# Altium PCB PFCv04.03.PcbDoc
Units mm, origin at the board's own origin, x right, y up, seen from the top; angles counter-clockwise.
Board outline 76.71 x 30.99 mm, 4 copper layers (Top Layer, Internal Plane 1, Internal Plane 2, Bottom Layer); 94 components, 74 nets, 404 pads, 188 vias.
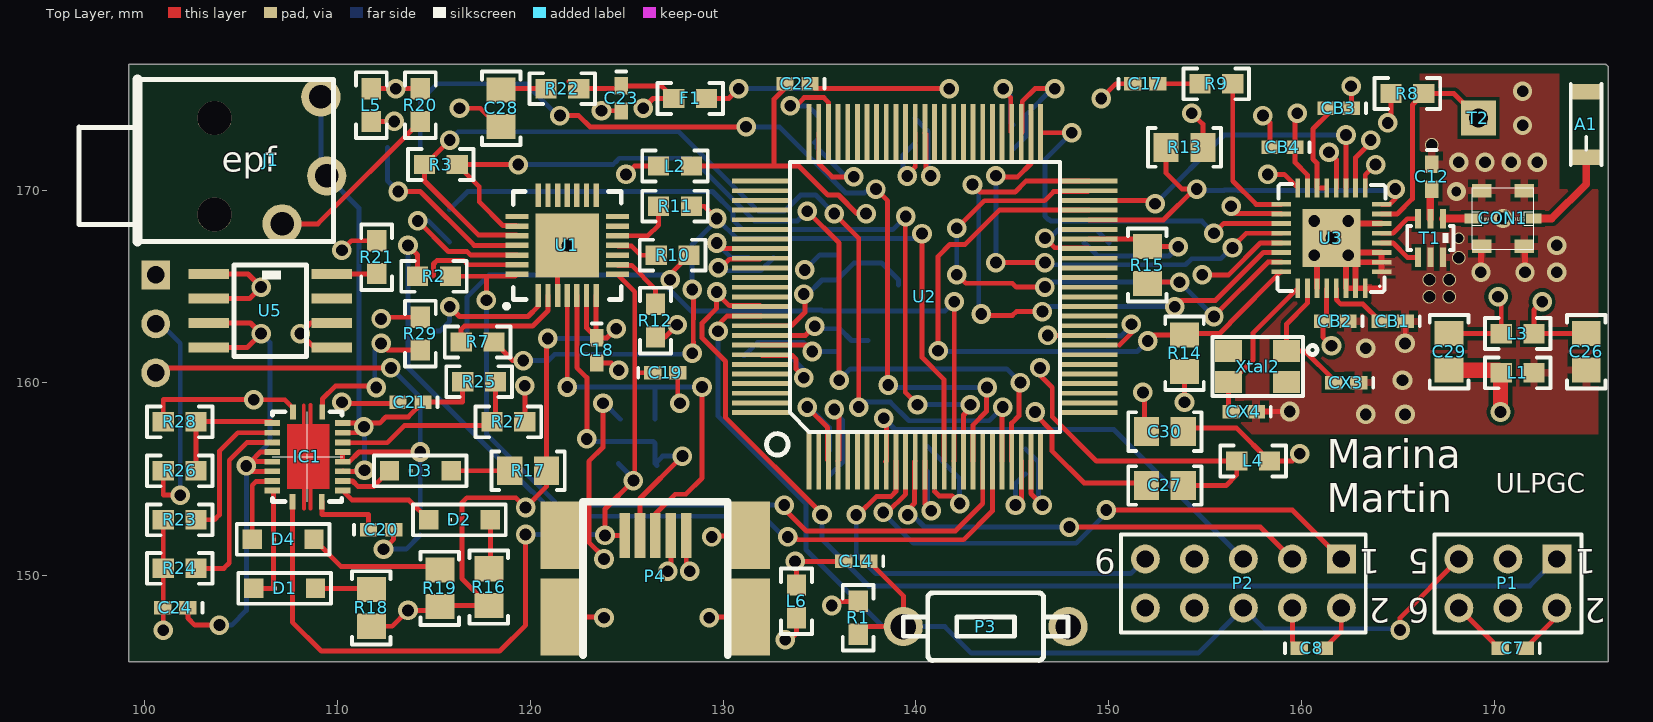
[diagram p0: Top Layer view]
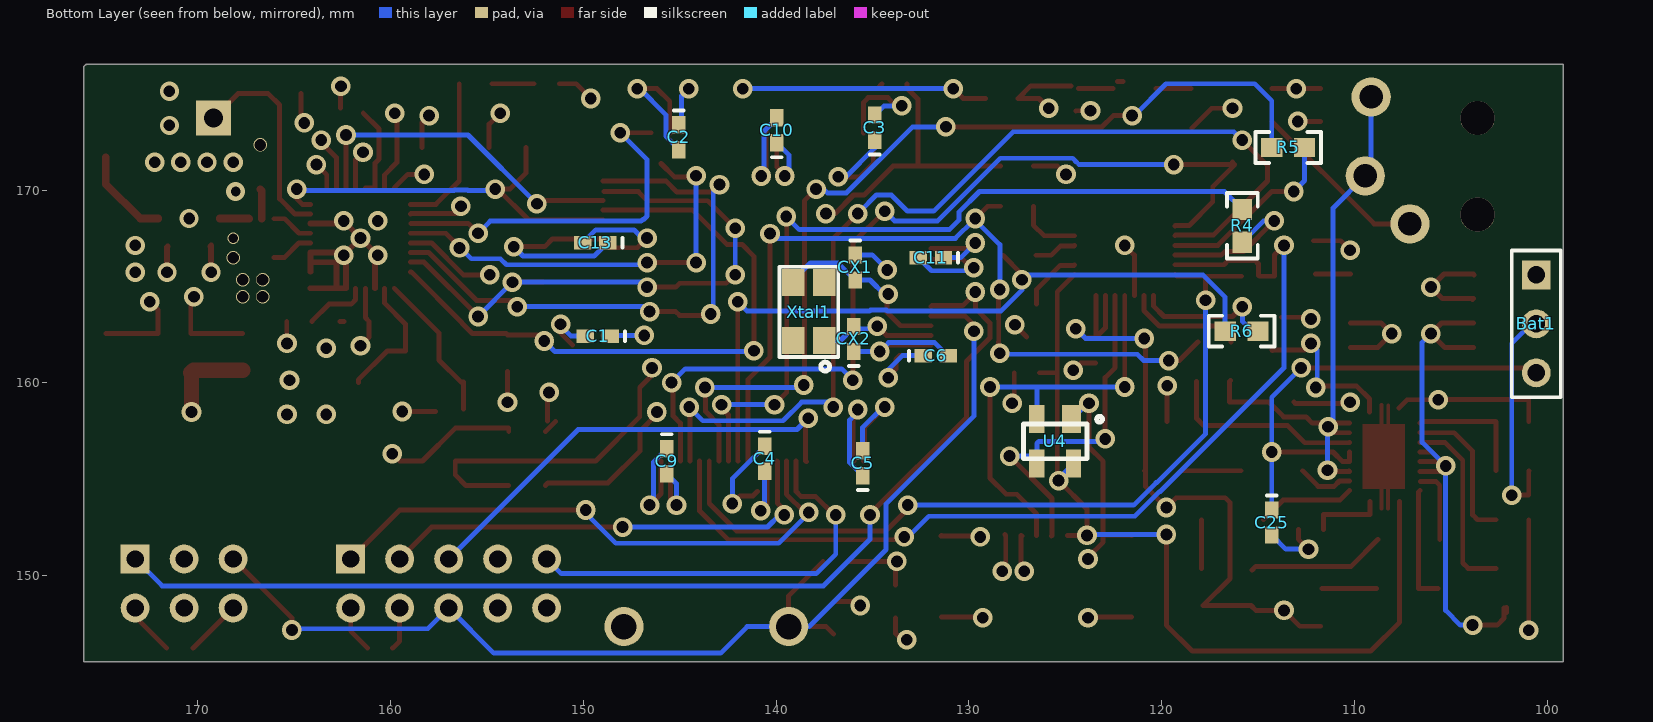
[diagram p1: Bottom Layer view, seen from below]
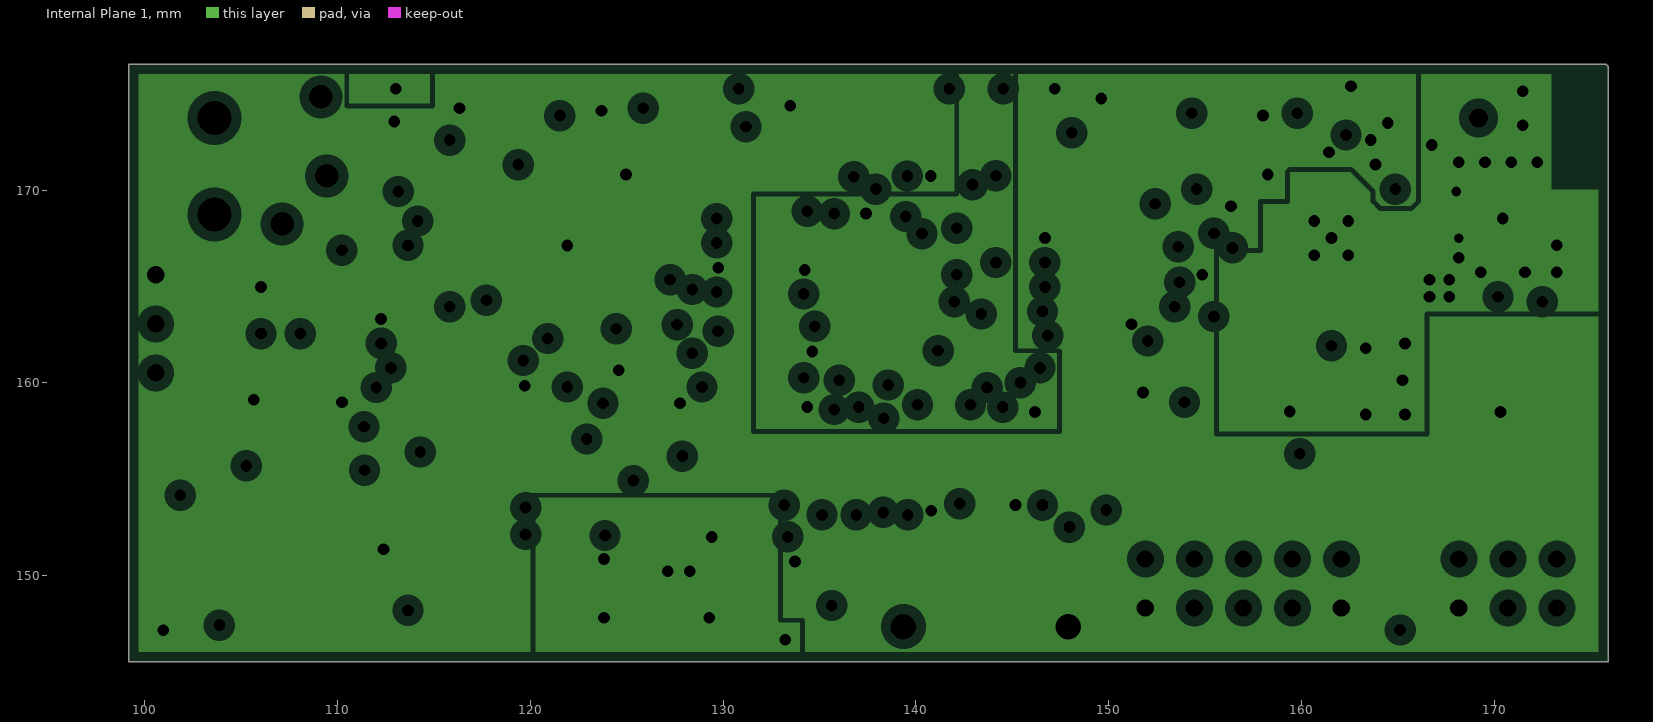
[diagram p2: Internal Plane 1, clearances drawn from the general rule]
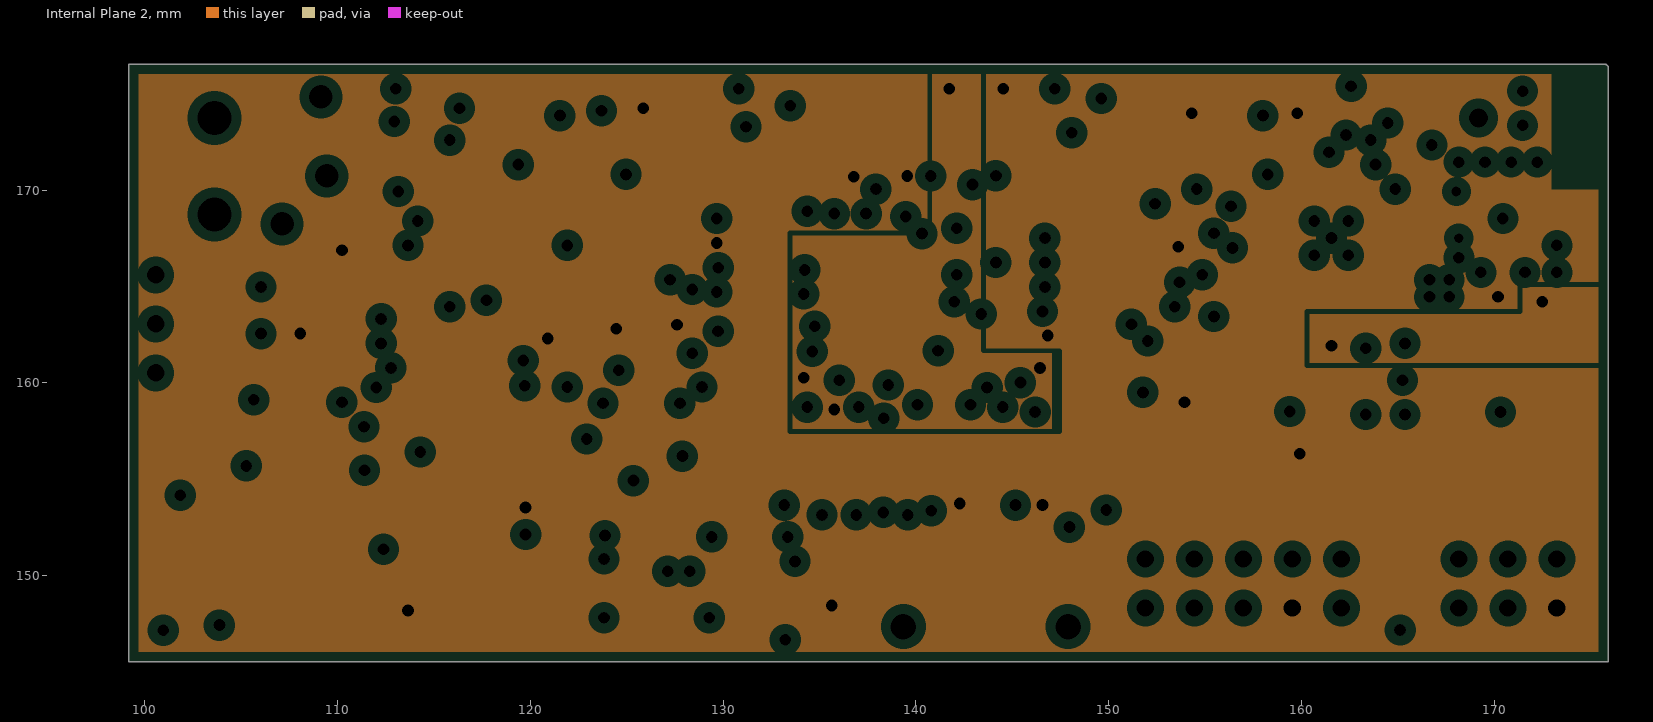
[diagram p3: Internal Plane 2, clearances drawn from the general rule]

## Layer stack, top to bottom
Top Layer: signal copper 0.0356
Dielectric: core 0.32, FR-4, Dk 4.8
Internal Plane 1: plane copper 0.0356, net (Multiple Nets)
Dielectric: prepreg 0.32, FR-4, Dk 4.8
Internal Plane 2: plane copper 0.0356, net (Multiple Nets)
Dielectric: core 0.32, FR-4, Dk 4.8
Bottom Layer: signal copper 0.0356

## Board outline
99.187,145.542 99.187,176.53 175.768,176.53 175.895,176.403 175.895,145.542 99.187,145.542

## Design rules (kind name [scope] priority, off if disabled: settings)
Clearance [All] p1: gap=0.2
ComponentClearance [All] p1: gap=0.15 collisioncheckmode=3 verticalgap=0.2 showdistances=TRUE
FabricationTestPointUsage TestPointUsage [All] p1: valid=0 allowmultiple=FALSE
FabricationTestpoint Testpoint [All] p1: side=3 testpointundercomponent=TRUE minsize=1.016 maxsize=2.54 preferedsize=1.524 minholesize=0 maxholesize=1.016 preferedholesize=0.813 testpointgrid=0.025 allowsidetop=TRUE allowsidebottom=TRUE usegrid=TRUE gridtolerance=0
MinimumSolderMaskSliver [All] p1 off: minsoldermaskwidth=0.1
PlaneClearance [All] p1: clearance=0.508
PlaneConnect [All] p1: planeconnectstyle=Direct reliefexpansion=0.508 reliefentries=4 reliefconductorwidth=0.254 reliefairgap=0.254
PolygonConnect PolygonConnect_2 [(IsVia AND InNet('RF-GND'))] p1: connectstyle=Direct reliefconductorwidth=0.254 reliefentries=4 polygonreliefangle="90 Angle"
PolygonConnect PolygonConnect_1 [All vs IsNamedPolygon('RFGND')] p2: connectstyle=Relief reliefconductorwidth=0.4 reliefentries=4 polygonreliefangle="90 Angle"
PolygonConnect [All] p3: connectstyle=Relief reliefconductorwidth=0.3 reliefentries=4 polygonreliefangle="90 Angle"
RoutingVias [All] p1: holewidth=0.4 width=0.9 viastyle="Through Hole" minholewidth=0.3 minwidth=0.3 maxholewidth=10 maxwidth=10
SilkToSilkClearance [All] p1 off: silktosilkclearance=0.2
SilkscreenOverComponentPads [All] p1 off: minsilkscreentomaskgap=0
SolderMaskExpansion [All] p1: expansion=0.102
Width [All] p1: maxlimit=10 minlimit=0.2 preferedwidth=0.2
20 further rules are at their usual default settings.

## Components (designator, comment, footprint, x,y, rotation, side; value= is the part's Value field where it differs from the comment)
A1 "Ant. 2.45G" "ANTENNA CHIP" 174.752,171.704 r90 top
Bat1 "Batttery" HDR1X3 100.584,165.608 r270 bottom
C1 "C" 0402 149.24,162.433 r0 bottom
C2 "C" 0402 145.034,172.735 r270 bottom
C3 "C" 0402 134.874,173.243 r90 bottom
C4 "C" 0402 140.589,156.068 r270 bottom
C5 "C" 0402 135.509,155.844 r90 bottom
C6 "C" 0402 131.714,161.417 r180 bottom
C7 "C" 0402 170.942,146.253 r180 top
C8 "C" 0402 160.528,146.253 r0 top
C9 "C" 0402 145.669,155.941 r270 bottom
C10 "C" 0402 139.954,173.101 r90 bottom
C11 "C" 0402 131.968,166.497 r0 bottom
C12 "22pF_0402" 0402 166.751,170.688 r270 top
C13 "C" 0402 149.367,167.259 r0 bottom
C14 "C" 0402 136.906,150.749 r180 top
C17 "C" 0402 151.892,175.514 r0 top
C18 "C" 0402 123.444,161.686 r270 top
C19 "C" 0402 127,160.528 r0 top
C20 "C" 0402 112.268,152.4 r0 top
C21 "C" 0402 113.792,159.004 r180 top
C22 "C" 0402 133.858,175.514 r180 top
C23 "C" 0402 124.714,174.752 r270 top
C24 "C" 0402 101.6,148.336 r180 top
C25 "C" 0402 114.3,152.766 r270 bottom
C26 "100nF_0805" 0805 174.752,161.62 r90 top
C27 "100nF_0805" 0805 152.908,154.686 r0 top
C28 "10uF" 0805 118.491,174.244 r90 top
C29 "100nF_0805" 0805 167.64,161.62 r90 top
C30 "100nF_0805" 0805 152.908,157.48 r0 top
CB1 "C" 0402 164.719,163.195 r180 top
CB2 "C" 0402 161.747,163.195 r180 top
CB3 "C" 0402 161.925,174.244 r180 top
CB4 "C" 0402 159.004,172.212 r180 top
CON1 "Conector Antena" "MM8430-2600_COAXIAL CONNECTORS" 170.434,168.529 r0 top
CX1 "C" 0402 135.89,165.989 r270 bottom
CX2 "C" 0402 135.966,162.281 r90 bottom
CX3 "C" 0402 162.306,160.02 r180 top
CX4 "C" 0402 156.997,158.521 r180 top
D1 "Diodo Led" "DIODE LED" 107.264,149.352 r180 top
D2 "Diodo Led" "DIODE LED" 116.332,152.908 r180 top
D3 "Diodo Led" "DIODE LED" 114.3,155.448 r180 top
D4 "Diodo Led" "DIODE LED" 107.188,151.892 r180 top
F1 "Ferrita" 0603 128.295,174.752 r0 top
IC1 "BQ24031" BQ24031 108.266,153.476 r90 top
J1 "CAMSHOT" MJ-2509N 99.644,170.739 r270 top
L1 "22nH_0603" 0603 171.196,160.528 r180 top
L2 "22nH_0603" 0603 127.508,171.247 r180 top
L3 "22nH_0603" 0603 171.196,162.56 r0 top
L4 "22nH_0603" 0603 157.48,155.956 r180 top
L5 "22nH_0603" 0603 111.76,174.41 r270 top
L6 "22nH_0603" 0603 133.807,148.678 r90 top
P1 "Programador" HDR2X3 173.228,150.876 r180 top
P2 "Programador" HDR2X5 162.052,150.876 r180 top
P3 "Pulsador" PUSH-BUTTON-W 139.344,147.371 r0 top
P4 "USB-AB" USB-MINI-AB-SMT 126.492,152.095 r90 top
R1 "R 0402" 0603 137.008,147.828 r90 top
R2 "R 0402" 0603 115.011,165.532 r180 top
R3 "R 0402" 0603 115.367,171.323 r180 top
R4 "R 0402" 0603 115.824,168.148 r90 bottom
R5 "R 0402" 0603 113.45,172.212 r0 bottom
R6 "R 0402" 0603 115.863,162.687 r0 bottom
R7 "R 0402" 0603 117.272,162.128 r0 top
R8 "R 0402" 0603 165.481,175.006 r180 top
R9 "R 0402" 0603 155.575,175.514 r180 top
R10 "R 0402" 0603 127.381,166.624 r180 top
R11 "R 0402" 0603 127.508,169.164 r180 top
R12 "R 0402" 0603 126.492,163.234 r90 top
R13 "16.9kohm-0805" 0805 153.924,172.212 r0 top
R14 "16.9kohm-0805" 0805 153.924,161.544 r270 top
R15 "16.9kohm-0805" 0805 151.994,166.116 r90 top
R16 "16.9kohm-0805" 0805 117.856,149.418 r270 top
R17 "16.9kohm-0805" 0805 119.888,155.448 r0 top
R18 "16.9kohm-0805" 0805 111.76,148.336 r270 top
R19 "16.9kohm-0805" 0805 115.316,149.352 r270 top
R20 "R 0402" 0603 114.3,174.41 r90 top
R21 "R 0402" 0603 112.039,166.522 r90 top
R22 "R 0402" 0603 121.666,175.26 r0 top
R23 "R 0402" 0603 101.823,152.908 r180 top
R24 "R 0402" 0603 101.823,150.391 r180 top
R25 "R 0402" 0603 117.348,160.071 r180 top
R26 "R 0402" 0603 101.823,155.448 r0 top
R27 "R 0402" 0603 118.872,157.988 r180 top
R28 "R 0402" 0603 101.823,157.988 r0 top
R29 "R 0402" 0603 114.3,162.56 r270 top
T1 "BALUN" BALUN 166.675,167.513 r270 top
T2 "TESTPOINT" TESTPOINT 169.164,173.736 r0 top
U1 "USB" QFN28_5X5 121.92,167.132 r90 top
U2 "XMEGA" QUAD100 140.462,164.465 r90 top
U3 "RF TRAN" QFN32_50 161.544,167.513 r90 top
U4 "TVS" SOT-143 125.527,156.972 r0 bottom
U5 "TPS77633D" TPS77633D 104.648,166.116 r270 top
Xtal1 "Xtal TSX-4025" TSX-4025 138.303,163.703 r90 bottom
Xtal2 "Xtal TSX-4025" TSX-4025 157.709,160.858 r180 top

## Footprints (in the part's own frame and the unit in brackets; to place one, negate y for a bottom-side part, rotate by r counter-clockwise, add the part's x,y. Pads: shape width x height; smd on the part's side, far side on the other; paste and mask are expansions set on the pad)
0402 [mm] "Chip Capacitor; Body 1.0 x 0.5 mm (LxW typ)"
  rect 0.9x0.7 smd: 1(-0.65,0) 2(0.65,0)
  silkscreen extent -1.4,-0.25 -1.4,0.25
0603 [mm]
  rect 1.1x1 smd: 1(-0.85,0) 2(0.85,0)
  silkscreen extent -1.7,-0.8 1.7,0.8
0805 [mm] "Chip Resistor; Body 2.0 x 1.3 mm (LxW typ)"
  rect 1.3x1.5 smd: 1(-0.95,0) 2(0.95,0)
  silkscreen extent -1.9,-1 1.9,1
"ANTENNA CHIP" [mm] "ANTENNA CHIP 2.4GHZ"
  rect 0.8x1.6 smd: 1(0,0) 2(3.4,0)
  silkscreen extent -0.4,-0.8 3.8,0.8
BALUN [mm] "FILTER BALUN CER CHIP 2.4GHZ"
  rect 1x0.3 smd: 1(-1,0.65) 2(-1,0) 3(-1,-0.65) 4(1,-0.65) 5(1,0) 6(1,0.65)
  silkscreen extent -0.62,-1.2 0.62,1.2
BQ24031 [mm]
  rect 0.8x0.3 smd: 1(0.37,-0.93) 10(5.02,-0.955) 11(5.02,0.57) 20(0.37,0.595)
  rect 0.3x0.8 smd: 2(0.945,-2.005) 3(1.445,-2.005) 4(1.945,-2.005) 5(2.445,-2.005) 6(2.945,-2.005) 7(3.445,-2.005) 8(3.945,-2.005) 9(4.445,-2.005) 12(4.445,1.645) 13(3.945,1.645) 14(3.445,1.645) 15(2.945,1.645) 16(2.445,1.645) 17(1.945,1.645) 18(1.445,1.645) 19(0.945,1.645)
  Top Layer region: 1.015,-1.315 4.39,-1.315 4.39,0.865 1.015,0.865
  Top Layer lines w0.2: 5.355,0.005 0,0 ; 0,-0.35 5.375,-0.35
  silkscreen extent 0.37,-2 5.03,1.65
"DIODE LED" [mm]
  rect 1x1 smd: 1(-1.6,0) 2(1.6,0)
  silkscreen extent -2.4,-0.8 2.4,0.8
HDR1X3 [mm] "Connector; Header; 3 Position"
  rect 1.5x1.5 hole 0.9: 1(0,0)
  round 1.5 hole 0.9: 2(2.54,0) 3(5.08,0)
  silkscreen extent -1.27,-1.27 6.35,1.27
HDR2X3 [mm] "Connector; Header; 3x2 Position"
  rect 1.5x1.5 hole 0.9: 1(0,0)
  round 1.5 hole 0.9: 2(0,2.54) 3(2.54,0) 4(2.54,2.54) 5(5.08,0) 6(5.08,2.54)
  silkscreen extent -1.27,-1.27 6.35,3.81
HDR2X5 [mm] "Connector; Header; 5x2 Position"
  rect 1.5x1.5 hole 0.9: 1(0,0)
  round 1.5 hole 0.9: 2(0,2.54) 3(2.54,0) 4(2.54,2.54) 5(5.08,0) 6(5.08,2.54) 7(7.62,0) 8(7.62,2.54) 9(10.16,0) 10(10.16,2.54)
  silkscreen extent -1.27,-1.27 11.43,3.81
MJ-2509N [mil] "CONN MONO JACK 2.5MM PCB MNT"
  round 80 hole 48: 1(98,295) 2(0,386) 3(-161,374)
  round 70 hole 70: NC(-118,157) NC(79,157)
  silkscreen extent -197,-120 134,400
"MM8430-2600_COAXIAL CONNECTORS" [mm]
  rect 0.8x0.5 smd: 1(-1.6,0) 2(1.6,0)
  rect 1x0.7 smd: 3(-1.1,1.45) 4(1.1,1.45) 5(-1.102,-1.45) 6(1.1,-1.45)
  silkscreen extent -1.6,-1.6 1.6,1.6
PUSH-BUTTON-W [mil] "SWITCH TACT 6X3.5MM H=4.3MM"
  round 80 hole 52: 1(0,0) 2(336.22,0)
  silkscreen extent 0,-69 336,69
QFN28_5X5 [mm] "QFN para SiLab CP2102"
  rect 3.3x3.3 smd: 0(0,0)
  rect 1.2x0.28 smd: 1(-2.6,1.5) 2(-2.6,1) 3(-2.6,0.5) 4(-2.6,0) 5(-2.6,-0.5) 6(-2.6,-1) 7(-2.6,-1.5) 15(2.6,-1.5) 16(2.6,-1) 17(2.6,-0.5) 18(2.6,0) 19(2.6,0.5) 20(2.6,1) 21(2.6,1.5)
  rect 0.28x1.2 smd: 8(-1.5,-2.6) 9(-1,-2.6) 10(-0.5,-2.6) 11(0,-2.6) 12(0.5,-2.6) 13(1,-2.6) 14(1.5,-2.6) 22(1.5,2.6) 23(1,2.6) 24(0.5,2.6) 25(0,2.6) 26(-0.5,2.6) 27(-1,2.6) 28(-1.5,2.6)
  silkscreen extent -3.25,-2.8 2.8,3.25
QFN32_50 [mm] "QFN32"
  rect 0.25x1 smd: 1(-1.75,-2.6) 2(-1.25,-2.6) 3(-0.75,-2.6) 4(-0.25,-2.6) 5(0.25,-2.6) 6(0.75,-2.6) 7(1.25,-2.6) 8(1.75,-2.6) 17(1.75,2.6) 18(1.25,2.6) 19(0.75,2.6) 20(0.25,2.6) 21(-0.25,2.6) 22(-0.75,2.6) 23(-1.25,2.6) 24(-1.75,2.6)
  rect 1x0.25 smd: 9(2.6,-1.75) 10(2.6,-1.25) 11(2.6,-0.75) 12(2.6,-0.25) 13(2.6,0.25) 14(2.6,0.75) 15(2.6,1.25) 16(2.6,1.75) 25(-2.6,1.75) 26(-2.6,1.25) 27(-2.6,0.75) 28(-2.6,0.25) 29(-2.6,-0.25) 30(-2.6,-0.75) 31(-2.6,-1.25) 32(-2.6,-1.75)
  rect 3x3 smd: 33(0,0)
  silkscreen extent -2.8,-2.8 2.8,2.8
QUAD100 [mm]
  rect 3x0.25 smd: 1(-8.5,6) 2(-8.5,5.5) 3(-8.5,5) 4(-8.5,4.5) 5(-8.5,4) 6(-8.5,3.5) 7(-8.5,3) 8(-8.5,2.5) 9(-8.5,2) 10(-8.5,1.5) 11(-8.5,1) 12(-8.5,0.5) 13(-8.5,0) 14(-8.5,-0.5) 15(-8.5,-1) 16(-8.5,-1.5) 17(-8.5,-2) 18(-8.5,-2.5) 19(-8.5,-3) 20(-8.5,-3.5) 21(-8.5,-4) 22(-8.5,-4.5) 23(-8.5,-5) 24(-8.5,-5.5) 25(-8.5,-6) 51(8.5,-6) 52(8.5,-5.5) 53(8.5,-5) 54(8.5,-4.5) 55(8.5,-4) 56(8.5,-3.5) 57(8.5,-3) 58(8.5,-2.5) 59(8.5,-2) 60(8.5,-1.5) 61(8.5,-1) 62(8.5,-0.5) 63(8.5,0) 64(8.5,0.5) 65(8.5,1) 66(8.5,1.5) 67(8.5,2) 68(8.5,2.5) 69(8.5,3) 70(8.5,3.5) 71(8.5,4) 72(8.5,4.5) 73(8.5,5) 74(8.5,5.5) 75(8.5,6)
  rect 0.25x3 smd: 26(-6,-8.5) 27(-5.5,-8.5) 28(-5,-8.5) 29(-4.5,-8.5) 30(-4,-8.5) 31(-3.5,-8.5) 32(-3,-8.5) 33(-2.5,-8.5) 34(-2,-8.5) 35(-1.5,-8.5) 36(-1,-8.5) 37(-0.5,-8.5) 38(0,-8.5) 39(0.5,-8.5) 40(1,-8.5) 41(1.5,-8.5) 42(2,-8.5) 43(2.5,-8.5) 44(3,-8.5) 45(3.5,-8.5) 46(4,-8.5) 47(4.5,-8.5) 48(5,-8.5) 49(5.5,-8.5) 50(6,-8.5) 76(6,8.5) 77(5.5,8.5) 78(5,8.5) 79(4.5,8.5) 80(4,8.5) 81(3.5,8.5) 82(3,8.5) 83(2.5,8.5) 84(2,8.5) 85(1.5,8.5) 86(1,8.5) 87(0.5,8.5) 88(0,8.5) 89(-0.5,8.5) 90(-1,8.5) 91(-1.5,8.5) 92(-2,8.5) 93(-2.5,8.5) 94(-3,8.5) 95(-3.5,8.5) 96(-4,8.5) 97(-4.5,8.5) 98(-5,8.5) 99(-5.5,8.5) 100(-6,8.5)
  silkscreen extent -8.21,-7 7,8.21
SOT-143 [mm] "SOT143"
  rect 1x1.45 smd: 1(-0.85,-1.15)
  rect 0.8x1.45 smd: 2(0.95,-1.15) 3(0.95,1.15) 4(-0.95,1.15)
  silkscreen extent -2.45,-1.3 1.65,0.9
TESTPOINT [mm] "Punto de test"
  rect 1.8x1.8 hole 1: 1(0,0)
TPS77633D [mm]
  rect 0.51x2.116 smd: 1(0.467,-1.312) 2(1.737,-1.312) 3(3.007,-1.312) 4(4.277,-1.312) 5(4.277,5.058) 6(3.007,5.058) 7(1.737,5.058) 8(0.467,5.058)
  silkscreen extent 0,0 4.75,3.75
TSX-4025 [mm] "Xtal 16Mhz"
  rect 1.4x1.15 smd: 1(-1.5,-0.8) 2(1.5,-0.8) 3(1.5,0.8) 4(-1.5,0.8)
  silkscreen extent -3.09,-1.52 2.33,1.53
USB-MINI-AB-SMT [mm] "Conector MINI-USB-AB-SMT"
  rect 2.35x0.55 smd: D+(0,0) D-(0,0.8) ID(0,-0.8) UGND(0,-1.6) VBUS(0,1.6)
  rect 4x2.05 smd: shield(-4.225,-4.925) shield(-4.225,4.925)
  rect 3.5x2.05 smd: shield(0,4.925) shield(0,-4.925)
  silkscreen extent -6.2,-3.75 1.75,3.75

## Part data
A1: library part 2450AT18A100, "ANTENNA CHIP 2.4GHZ"
Bat1: library part "Header 3", "Header, 3-Pin"
C1 C2 C3 C4 C5 C6 C7 C8 C9 C10 C11 C13 C14 C17 C18 C19 C20 C21 C22 C23 C24 C25 CB1 CB2 CB3 CB4 CX1 CX2 CX3 CX4: "CONDENSADOR"
C12: library part 56pF_0402, "CAP CER 56PF 50V 5% C0G 0402"
C26 C27 C29 C30: "CAP CER 100PF 630V X7R 0805"
C28: library part 10uF_0805, "CAP CER 10UF 10V Y5V 0805"
CON1: library part "CON ANT-MM8430-2600RA1", "CONN MW COAXIAL WITH SWITCH"
D1 D2 D3 D4: library part LTST-C230CKT, "Typical INFRARED GaAs LED"
F1: library part BLM21AH102SN1, "Chip Ferrite Beads"
IC1: "IC PWR MANAGEMENT SYSTEM 20-QFN"
J1: library part MJ-2509N_1, "CONN MONO JACK 2.5MM PCB MNT"
L1 L2 L3 L4 L5 L6: "CER INDUCTOR 22NH 0603"
P1: library part "Header 3X2", "Header, 3-Pin, Dual row"
P2: library part "Header 5X2", "Header, 5-Pin, Dual row"
P3: library part PUSHBUTTON, "SWITCH TACT 6X3.5MM H=4.3MM 180G"
P4: library part WM1722, "CONN RECEPT USB 5POS RT ANG SMD"
R1 R2 R3 R4 R5 R6 R7 R8 R9 R10 R11 R12 R20 R21 R22 R23 R24 R25 R26 R27 R28 R29: "RESISTENCIA 0402 SMD"
R13 R14 R15 R16 R17 R18 R19: "RES 16.9K OHM 1/8W 1% 0805 SMD"
T1: library part 2450FB39B100E, "FILTER BALUN CER CHIP 2.4GHZ"
T2: "Punto de Test"
U1: library part CP2102, "IC USB-TO-UART BRIDGE 28MLP"
U2: library part ATXMEGA64A1, "MCU AVR 64K FLASH 1.6V 100-TQFP"
U3: library part AT86RF231, "IC TXRX ZIGBEE/802.15.4 32QFN"
U4: library part SP0503BAHTG, "TVS AVAL DIODE ARRAY 3 CH SOT143"
U5: "IC 3.3V 500MA LDO REG 8-SOIC"
Xtal1 Xtal2: "Cristal 16Mhz"

## Via types
v1: diameter 1.016, hole 0.61, Top Layer to Bottom Layer, 168 vias
v2: diameter 1, hole 0.6, Top Layer to Bottom Layer, 11 vias
v3: diameter 0.7, hole 0.6, Top Layer to Bottom Layer, 6 vias
v4: diameter 1, hole 0.5, Top Layer to Bottom Layer, 1 vias
v5: diameter 1.016, hole 0.61, Top Layer to Bottom Layer, tented bottom, 1 vias
v6: diameter 0.6, hole 0.5, Top Layer to Bottom Layer, 1 vias

## Nets (pads, with @x,y where several pads share a name; then routed paths per layer and width w, separated by ;. In a path a pad name is that pad's centre, name@x,y a point inside that pad or via, vN(x,y) a via of type N, cw(c..) or ccw(c..) an arc to the next point about the centre after c; other vN are vias at no path point)
A-GND: C5.2 C6.2 C22.2 C27.1 CX1.1 CX2.1 L2.1 U2.3 U2.93 | length 39.1
  Top Layer w0.254: L2.1 133.934,171.247 135.436,169.745 135.982,169.745 136.944,168.783 v1(137.414,168.783) ; U2.93 134.326,161.965 v1@134.641,161.65 ; 132.642,171.301 132.642,174.717 133.208,175.283 C22.2 ; v1(134.366,158.75) 135.414,157.702 135.414,156.013 U2.3 ; v1(146.177,158.496) 146.177,158.369 147.062,157.484 147.062,156.468 148.717,154.813 151.831,154.813 C27.1
  Bottom Layer w0.254: C6.2 C6.2@131.191,161.544 ; C6.2@131.102,161.417 131.779,162.094 134.159,162.094 v1(134.623,161.631) CX2.1 ; v1(134.239,165.862) 135.016,166.639 CX1.1 ; v1(134.366,158.75) 134.455,158.75 135.509,157.696 C5.2 C5.2@135.509,156.718
A-VCC: C5.1 C6.1 C22.1 C27.2 F1.2 L4.2 U2.4 U2.94 | length 48.4
  Top Layer w0.254: F1.2 130.302,174.752 v1(130.81,175.26) ; U2.94@132.01,161.417 133.597,161.417 133.789,161.226 133.789,160.724 v1@134.239,160.274 ; C22.1 134.762,175.26 v1(141.732,175.26) ; U2.4 136.01,156.013 v1@136.01,158.242 ; v1(146.431,160.782) 146.431,160.401 147.066,159.766 147.066,158.242 149.352,155.956 L4.2 156.63,155.233 156.083,154.686 C27.2
  Bottom Layer w0.254: v1(130.81,175.26) v1(141.732,175.26) ; C6.1 133.456,161.417 134.239,160.634 v1@134.239,160.274 ; C5.1 136.186,155.871 136.186,158.073 v1@136.017,158.242
  other v1: 135.763,158.623 134.188,160.274
D+: P4.D+ U1.4 U4.2 | length 22
  Top Layer w0.254: v1(121.92,159.791) U1.4 ; P4.D+ 126.492,153.208 127.516,154.232 128.07,154.232 128.905,155.067 v1@128.905,159.385
  Bottom Layer w0.254: v1(121.92,159.791) 126.477,159.791 ; U4.2 126.477,159.791 ; v1(128.905,159.791) 126.477,159.791
D-: P4.D- U1.5 U4.3 | length 18.9
  Top Layer w0.254: U1.5 122.42,160.79 122.936,160.274 v1(122.936,157.099) ; P4.D-@125.73,152.057 P4.D- 125.692,154.013 v1(127.889,156.21)
  Bottom Layer w0.254: v1@123.063,156.972 126.365,156.972 126.477,156.86 U4.3 ; U4.3@126.576,155.723 U4.3 ; v1(127.889,156.21) 126.865,156.21 U4.3
DC-GND: L5.1 R20.2 | length 2.5
  Top Layer w0.254: L5.1 R20.2
  other v1: 113.03,175.26
GND: Bat1.1 C1.2 C2.2 C3.2 C4.2 C7.2 C8.2 C9.2 C10.2 C11.2 C13.2 C14.2 C17.1 C18.2 C19.2 C20.2 C21.2 C23.2 C24.2 C25.2 C28.1 C29.1 C30.1 CB3.1 CB4.2 IC1.11 L1.2 L2.2 L5.2 L6.2 P1.6 P2.2 P2.10 P3.2 R8.2 R23.2 R24.2 R27.1 R28.1 R29.1 U1.0 U1.3 U2.13 U2.23 U2.33 U2.43 U2.53 U2.63 U2.73 U2.84 U3.9 U3.10 U3.12 U3.16 U3.18 U3.21 U5.1 U5.2 | length 121.6
  Top Layer w0.254: v1(100.973,147.185) R24.2 R23.2 ; R28.1 100.973,159.139 v1@105.656,159.139 ; U5.1@103.803,165.608 103.844,165.649 105.369,165.649 v1(106.045,164.973) 105.451,164.379 103.844,164.379 U5.2@103.884,164.338 ; v1(105.664,159.131) 107.277,159.131 IC1.11@107.696,158.712 ; v1(110.236,159.004) 110.309,158.931 113.069,158.931 C21.2 ; L5.2 v1(112.952,173.56) ; v1(112.268,163.322) 112.356,163.41 113.792,163.41 ; v1(112.395,151.384) 112.918,151.907 C20.2 ; v1(116.332,174.244) 117.414,174.244 C28.1@118.427,173.231 ; R27.1 v1(119.722,159.854) ; U1.3 121.42,166.632 v1(121.92,167.132) ; C18.2 124.206,161.036 v1(124.587,160.655) ; v1(123.698,174.117) 124.445,174.117 C23.2@124.46,174.102 ; v1(124.968,170.815) 125.4,171.247 L2.2 ; C19.2 127.65,159.116 v1@127.762,159.004 ; v1(129.754,165.971) 129.811,165.914 129.823,165.914 130.327,166.417 131.914,166.417 U2.84 ; v1(133.477,174.371) 133.781,174.371 134.202,174.792 135.223,174.792 135.462,174.552 U2.73 ; v1(133.731,150.749) C14.2 ; L6.2 v1@133.807,150.673 ; U2.13 140.462,153.721 140.789,153.394 v1(140.789,153.37) ; U2.63 140.51,172.917 140.51,170.987 v1(140.767,170.73) ; v1(145.161,153.67) 145.462,153.971 U2.23 ; U2.53 145.51,173.013 145.51,174.6 146.17,175.26 v1(147.193,175.26) ; v1(146.685,167.513) 147.187,167.011 U2.43@148.916,167.011 ; v1(149.606,174.752) 150.368,175.514 C17.1 ; 150.549,161.965 151.17,162.586 v1(151.17,163.05) ; C30.1@151.425,158.013 C30.1 ; v1(151.765,159.512) v1@151.958,159.319 ; C30.1@151.848,158.032 v1@151.848,159.429 ; v1@154.94,165.608 156.21,165.608 157.865,167.263 U3.21 ; v1(156.337,169.164) 156.337,169.037 156.591,168.783 158.924,168.783 U3.18 ; v1(157.988,173.863) 158.354,173.497 CB4.2 ; v1(158.242,170.815) 159.092,170.815 U3.16 ; C8.2 162.052,147.127 P2.2 ; v1(161.417,171.958) 161.794,171.581 U3.12 ; v1(162.56,175.387) 162.575,175.372 CB3.1 ; U3.10 162.794,171.684 ; 162.829,171.719 v1@163.703,172.593 ; U3.9 163.294,170.787 v1(163.83,171.323) ; v1@164.631,173.482 R8.2 ; P1.6 C7.2@170.231,146.253
  Top Layer w0.8: C29.1 170.204,160.67 L1.2 170.307,160.489 v1(170.307,158.496)
  Bottom Layer w0.254: v1(112.395,151.384) 113.568,151.384 C25.2 ; v1(129.754,165.971) 129.754,165.881 129.815,165.82 131.941,165.82 C11.2 ; v1(133.477,174.371) 134.396,174.371 C3.2 C3.2@134.874,173.855 ; C10.2 139.954,173.713 140.631,173.036 v1@140.631,170.866 ; C4.2 140.589,153.594 140.789,153.394 v1(140.789,153.37) ; C2.2@145.034,172.123 145.711,172.8 145.711,173.905 v1@147.13,175.323 ; v1(145.161,153.67) 145.161,154.783 C9.2 ; v1(146.685,167.513) 146.939,167.513 147.362,167.936 149.34,167.936 C13.2 ; C1.2 150.622,162.433 v1@151.17,162.981
  other v1: 127.762,158.953 154.838,165.608 163.576,172.593 164.465,173.482
IRQ: R14.1 U2.47 U3.24 | length 32.9
  Top Layer w0.254: v1@141.151,161.671 141.151,166.57 141.767,167.186 142.548,167.186 144.327,168.965 U2.47 ; v1(152.019,162.179) 152.334,162.494 R14.1 153.995,162.565 155.744,162.565 156.283,163.103 156.283,163.123 158.923,165.763 U3.24
  Bottom Layer w0.254: v1@141.519,161.63 151.47,161.63 v1(152.019,162.179)
  other v1: 141.148,161.671
ISET2: IC1.7 R25.1 R27.2 | length 10.4
  Top Layer w0.254: IC1.7 110.293,156.899 112.583,156.899 113.472,157.788 117.822,157.788 118.198,158.164 R25.1
NetA1_1: A1.1 CON1.2 | length 4.9
  Top Layer w0.394: CON1.2 172.974,168.529 174.752,170.307 A1.1
NetBat1_2: Bat1.2 R26.1 | length 11.6
  Top Layer w0.254: R26.1@100.965,155.448 R26.1 100.973,154.186 v1@101.846,154.186
  Bottom Layer w0.254: Bat1.2 100.838,163.068 101.854,162.052 v1@101.854,154.305
  other v1: 101.854,154.178
NetBat1_3: Bat1.3 C25.1 IC1.5 IC1.6 | length 25.2
  Top Layer w0.254: Bat1.3 100.838,160.782 v1(112.776,160.782) ; IC1.6 IC1.5 110.625,155.921 111.125,156.421 v1(114.3,156.421)
  Bottom Layer w0.254: Bat1.3@100.457,160.528 Bat1.3 ; v1(112.776,160.782) 114.3,159.258 v1(114.3,156.421) C25.1
NetC12_2: C12.2 T1.2 | length 1.6
  Top Layer w0.39: T1.2 166.675,169.962 C12.2
NetC17_2: C17.2 R9.2 | length 2.2
  Top Layer w0.254: C17.2 R9.2
NetC20_1: C20.1 IC1.1 | length 3.9
  Top Layer w0.254: IC1.1 109.196,153.186 111.609,153.186 111.618,153.177 C20.1
NetC24_1: C24.1 IC1.15 IC1.16 IC1.17 U5.3 U5.4 | length 28.7
  Top Layer w0.254: C24.1@102.119,148.085 102.13,148.341 C24.1@102.131,148.359 ; C24.1 102.25,147.813 102.616,147.447 v1(103.886,147.447) ; U5.4@103.844,161.839 105.324,161.839 v1(106.045,162.56) 105.496,163.109 U5.3@103.844,163.109 ; IC1.17 105.564,155.421 v1(105.283,155.702) v1@105.502,155.921 ; IC1.16 v1@105.502,155.921 ; IC1.15 106.002,156.421 v1@105.502,155.921
  Bottom Layer w0.254: v1(103.886,147.447) 104.521,147.447 105.283,148.209 v1(105.283,155.702) 106.499,156.918 106.499,162.106 v1(106.045,162.56) v1@106.045,162.306
NetC28_2: C28.2 R22.1 | length 1.8
  Top Layer w0.254: C28.2@118.491,175.26 R22.1@120.308,175.26
NetCB1_2: CB1.2 U3.29 | length 3.3
  Top Layer w0.254: U3.29 161.794,164.326 162.034,164.086 163.178,164.086 CB1.2
NetCB3_2: CB3.2 U3.13 U3.14 | length 4.8
  Top Layer w0.254: U3.13 U3.14 160.794,171.4 160.582,171.612 160.582,173.17 CB3.2@161.402,173.99
NetCON1_1: CON1.1 T1.1 | length 1.5
  Top Layer w0.394: T1.1 167.341,168.529 CON1.1
NetCX1_2: CX1.2 U2.91 Xtal1.3 | length 9.6
  Top Layer w0.254: U2.91 133.549,162.965 134.239,163.655 v1@134.239,164.592
  Bottom Layer w0.254: v1@134.356,164.567 135.128,165.339 135.902,165.339 136.793,166.23 138.213,166.23 139.103,165.34 Xtal1.3 Xtal1.3@139.103,165.066
  other v1: 134.188,164.611
NetCX2_2: CX2.2 U2.92 Xtal1.1 | length 6.4
  Top Layer w0.254: U2.92 134.271,162.465 v1(134.747,162.941)
  Bottom Layer w0.254: v1@134.747,162.814 v1@134.62,162.814 ; v1(134.747,162.941) v1@134.62,162.814 ; Xtal1.1 136.656,162.203 136.045,162.814 v1@134.62,162.814
NetCX3_2: CX3.2 U3.26 Xtal2.1 | length 6.9
  Top Layer w0.254: U3.26 160.294,164.134 159.209,163.049 Xtal2.1 160.16,161.658 161.656,160.162 CX3.2
NetCX4_2: CX4.2 U3.25 Xtal2.3 | length 7.8
  Top Layer w0.254: CX4.2@156.209,158.66 Xtal2.3 156.346,160.058 157.48,161.192 157.48,162.599 U3.25
NetD1_1: D1.1 R18.1 | length 2.8
  Top Layer w0.254: D1.1 R18.1@111.694,149.352
NetD1_2: D1.2 IC1.19 | length 6.1
  Top Layer w0.254: D1.2 106.68,149.352 106.68,154.362 IC1.19
NetD2_1: D2.1 R16.1 | length 2.5
  Top Layer w0.254: R16.1@117.932,150.368 D2.1
NetD2_2: D2.2 IC1.2 | length 5.1
  Top Layer w0.254: IC1.2 110.768,153.924 113.716,153.924 D2.2
NetD3_1: D3.1 R17.1 | length 3
  Top Layer w0.254: D3.1 R17.1
NetD3_2: D3.2 IC1.3 | length 2.9
  Top Layer w0.254: IC1.3 110.783,154.921 111.062,154.642 111.894,154.642 D3.2
NetD4_1: D4.1 R19.1 | length 7.2
  Top Layer w0.254: D4.1 110.185,150.495 115.123,150.495 R19.1
NetD4_2: D4.2 IC1.18 | length 3.9
  Top Layer w0.254: D4.2 105.588,154.699 105.787,154.898 IC1.18@106.598,154.898
NetIC1_10: IC1.10 R29.2 | length 8.5
  Top Layer w0.254: IC1.10 109.221,159.17 109.89,159.839 111.941,159.839 v1(112.014,159.766) ; v1(112.268,162.052) 112.61,161.71 R29.2 R29.2@114.261,161.671
  Bottom Layer w0.254: v1(112.014,159.766) 111.941,159.839 111.941,161.725 v1(112.268,162.052)
NetIC1_13: IC1.13 R23.1 | length 7.8
  Top Layer w0.254: R23.1 103.632,152.908 103.886,153.162 103.886,156.464 104.843,157.421 IC1.13 IC1.13@106.616,157.426
NetIC1_14: IC1.14 R24.1 | length 9.8
  Top Layer w0.254: R24.1@102.718,150.391 R24.1 104.117,150.391 104.394,150.667 104.394,155.994 105.321,156.921 IC1.14
NetJ1_1: J1.1 R20.1 | length 9.4
  Top Layer w0.254: J1.1 108.99,168.25 R20.1
NetR4_1: R4.1 U1.26 | length 8
  Top Layer w0.254: v1(114.173,168.402) 115.762,166.813 116.735,166.813 116.915,166.632 U1.26
  Bottom Layer w0.254: v1(114.173,168.402) 114.72,168.402 R4.1
NetR5_1: R5.1 U1.25 | length 9.8
  Top Layer w0.254: v1(113.157,169.926) 114.3,169.926 117.094,167.132 U1.25
  Bottom Layer w0.254: R5.1 112.6,170.483 v1(113.157,169.926)
NetR6_1: R6.1 U1.1 | length 7.4
  Top Layer w0.254: v1(115.824,163.957) 116.332,163.449 119.888,163.449 120.42,163.981 U1.1
  Bottom Layer w0.254: R6.1 115.316,162.687 115.824,163.195 v1(115.824,163.957)
NetR7_1: R7.1 U1.2 | length 6.3
  Top Layer w0.254: R7.1 116.422,162.777 116.6,162.955 120.128,162.955 120.92,163.747 U1.2
NetR8_1: R8.1 T2.1 U3.7 | length 11
  Top Layer w0.254: U3.7 164.953,168.763 165.735,169.545 165.735,174.41 R8.1 167.894,175.006 T2.1
NetR9_1: R9.1 U3.17 | length 8.1
  Top Layer w0.254: R9.1 156.425,170.473 157.635,169.263 U3.17
NetR10_2: R10.2 U1.11 | length 2.2
  Top Layer w0.254: U1.11 124.553,167.099 125.255,167.099 125.73,166.624 R10.2
NetR11_2: R11.2 U1.12 | length 3.3
  Top Layer w0.254: U1.12 126.103,167.632 126.658,168.187 R11.2
NetR12_2: R12.2 U1.9 | length 3.3
  Top Layer w0.254: U1.9 124.553,166.099 125.255,166.099 126.492,164.862 R12.2
NetR21_1: R21.1 U5.8 | length 1.8
  Top Layer w0.254: U5.8@110.214,165.649 R21.1@112.039,165.649
NetT1_3: T1.3 U3.5 | length 2.2
  Top Layer w0.254: U3.5 164.731,167.763 165.481,168.513 T1.3
NetT1_4: T1.4 U3.4 | length 2.2
  Top Layer w0.254: U3.4 164.731,167.263 165.481,166.513 T1.4
NRST: R13.1 U2.46 U3.8 | length 20.8
  Top Layer w0.254: U2.46@148.964,168.463 U2.46 148.971,168.456 152.835,168.456 154.432,170.053 153.797,170.053 152.974,170.876 R13.1 ; U3.8 164.564,169.263 164.846,169.545 v1(164.846,170.053)
  Bottom Layer w0.254: v1@154.632,169.98 155.972,169.98 155.991,169.999 156.683,169.999 156.702,169.98 v1@164.773,169.98
  other v1: 154.559,170.053
NSEL: R15.1 U2.49 U3.23 | length 30.7
  Top Layer w0.254: v1(142.113,165.608) 142.154,165.608 142.589,165.173 144.999,165.173 145.199,164.973 v1(146.685,164.973) ; v1(142.113,168.021) 143.542,169.45 146.667,169.45 147.137,169.919 U2.49@148.916,169.919 ; R15.1@152.055,165.227 v1(153.67,165.227) ; v1@155.448,163.456 158.255,166.263 U3.23
  Bottom Layer w0.254: v1(142.113,165.608) v1(142.113,168.021) ; v1(146.685,164.973) 146.939,165.227 v1(153.67,165.227) v1(155.448,163.449)
PIN9: P2.5 U2.9 | length 24.3
  Top Layer w0.254: v1(138.327,158.173) 138.381,158.173 138.462,158.091 U2.9 U2.9@138.414,155.917
  Bottom Layer w0.254: v1@138.406,158.091 v1@138.409,158.091 ; P2.5 150.26,157.588 138.912,157.588 v1@138.409,158.091 ; v1@138.409,158.091 138.462,158.091 138.381,158.173 v1(138.327,158.173) v1@138.409,158.091
PIN10: P2.9 U2.10 | length 21.9
  Top Layer w0.254: v1(136.906,153.162) 136.995,153.162 137.957,154.124 138.709,154.124 138.962,154.378 U2.10
  Bottom Layer w0.254: v1(136.906,153.162) 136.906,151.13 137.922,150.114 151.13,150.114 P2.9
PIN11: P2.1 U2.11 | length 29.6
  Top Layer w0.254: v1(138.303,153.289) 138.516,153.289 139.462,154.236 U2.11 ; v1(149.86,153.416) 159.512,153.416 P2.1
  Bottom Layer w0.254: v1(138.303,153.289) 138.303,153.251 139.862,151.692 148.301,151.692 149.86,153.251 v1(149.86,153.416)
PIN12: P2.3 U2.12 | length 23.9
  Top Layer w0.254: v1(139.573,153.162) 139.573,153.416 139.932,153.775 139.932,155.935 U2.12 ; v1(147.955,152.527) 157.861,152.527 P2.3
  Bottom Layer w0.254: v1(139.573,153.162) 139.816,153.162 140.443,152.535 147.947,152.535 v1(147.955,152.527)
PIN15: R7.2 R11.1 U2.15 | length 43.6
  Top Layer w0.254: R7.2 119.087,161.163 v1(119.634,161.163) ; R11.1 129.032,169.164 v1(129.667,168.529) ; v1(128.397,161.544) 128.47,161.617 128.47,162.134 128.451,162.153 128.451,163.294 128.47,163.313 128.47,164.773 v1(128.397,164.846) ; v1(140.313,167.745) 140.313,161.325 141.462,160.176 U2.15
  Bottom Layer w0.254: v1(119.634,161.163) 120.942,161.163 121.269,161.49 128.343,161.49 v1(128.397,161.544) ; v1(128.397,164.846) 128.397,167.17 v1@129.667,168.44 ; v1(129.667,168.529) v1@129.667,168.44 ; v1@140.189,167.621 v1(140.313,167.745) 140.062,167.494 130.702,167.494 129.756,168.44 v1@129.667,168.44
PIN16: R6.2 R10.1 U2.16 | length 38.8
  Top Layer w0.254: v1(127.254,165.354) 127.254,165.647 R10.1 ; U2.16 141.986,155.989 v1(141.986,164.211)
  Bottom Layer w0.254: R6.2 116.713,164.452 117.856,165.595 127.013,165.595 v1(127.254,165.354) 127.254,164.808 128.34,163.722 134.22,163.722 134.274,163.776 135.093,163.776 135.147,163.722 141.497,163.722 v1(141.986,164.211)
PIN17: R4.2 U2.17 | length 42
  Top Layer w0.254: v1@139.471,168.724 139.471,168.91 v1(139.471,168.631) 139.446,168.641 139.446,159.512 v1(140.081,158.877) ; U2.17 142.462,158.337 v1@143.002,158.877
  Bottom Layer w0.254: R4.2 116.752,169.926 129.451,169.926 130.518,168.859 130.518,168.44 131.01,167.948 138.789,167.948 v1(139.471,168.631) ; v1(140.081,158.877) v1@143.002,158.877
  other v1: 142.824,158.877
PIN18: R5.2 U2.18 | length 49.2
  Top Layer w0.254: v1(121.539,173.863) 122.517,173.863 123.098,173.282 v1(131.191,173.282) ; v1(137.922,170.053) 138.532,169.443 138.532,159.741 138.557,159.766 v1(138.557,159.893) ; U2.18 142.962,157.834 143.659,158.531 v1@143.659,159.737
  Bottom Layer w0.254: R5.2 114.3,174.625 115.189,175.514 119.78,175.514 121.431,173.863 v1(121.539,173.863) ; v1(131.191,173.282) 132.915,173.282 136.344,169.853 137.341,169.853 137.541,170.053 v1(137.922,170.053) ; v1@138.303,159.766 v1(143.688,159.766) 143.71,159.766 v1@143.837,159.893
PIN19: R2.1 U1.28 U2.19 | length 42.4
  Top Layer w0.254: R2.1 117.729,165.532 ; v1(117.729,164.287) 117.729,165.532 ; U1.28 119.22,165.532 117.729,165.532 ; v1(133.172,153.67) 133.172,153.467 134.312,152.327 142.04,152.327 143.462,153.749 U2.19
  Bottom Layer w0.254: v1(117.729,164.287) 117.729,157.36 120.257,154.832 120.295,154.832 121.457,153.67 v1(133.172,153.67)
PIN20: R2.2 U1.27 U2.20 | length 50.9
  Top Layer w0.254: v1(113.665,167.132) 114.161,166.636 R2.2 114.935,165.532 114.984,165.581 114.984,166.167 115.176,166.359 116.547,166.359 116.773,166.132 U1.27 ; v1@133.731,152.019 133.877,151.873 142.475,151.873 143.962,153.36 U2.20 U2.20@143.964,155.963
  Bottom Layer w0.254: v1(113.665,167.132) 113.665,160.782 120.069,154.378 120.107,154.378 121.396,153.089 132.08,153.089 133.15,152.019 v1(133.35,152.019)
PIN21: R3.2 U1.24 U2.21 | length 52.7
  Top Layer w0.254: v1(115.824,172.593) 114.554,171.323 R3.2 114.517,170.471 117.323,167.665 119.287,167.665 U1.24 ; v1(135.763,168.783) 137.033,167.513 v1(137.033,158.75) ; U2.21 v1@144.462,158.75
  Bottom Layer w0.254: v1(115.824,172.593) 116.259,173.028 127.708,173.028 131.826,168.91 133.185,168.91 134.02,169.745 134.801,169.745 v1@135.636,168.91 ; v1(137.033,158.75) 137.291,159.008 138.673,159.008 139.639,158.042 143.793,158.042 v1(144.501,158.75) ; v1@137.16,158.712 v1@137.16,158.75
PIN22: R3.1 U1.23 U2.22 | length 48.3
  Top Layer w0.254: R3.1@116.344,171.45 R3.1 ; U1.23 119.287,168.165 118.585,168.165 117.36,169.39 117.36,170.18 R3.1 ; v1(119.38,171.323) R3.1 ; v1(134.366,168.91) 136.017,167.259 v1(136.017,160.147) ; U2.22 144.962,157.916 145.342,158.296 145.342,159.947 v1(145.415,160.02)
  Bottom Layer w0.254: v1(119.38,171.323) 124.295,171.323 ; 124.422,171.45 124.622,171.65 128.369,171.65 131.617,168.402 133.858,168.402 v1(134.366,168.91) ; v1(136.017,160.147) 136.598,160.728 144.707,160.728 v1(145.415,160.02)
PIN48: U2.48 U3.11 | length 17.6
  Top Layer w0.254: U2.48 152.226,169.465 v1(152.4,169.291) ; U3.11 v1(162.294,172.859)
  Bottom Layer w0.254: v1(152.4,169.291) 155.968,172.859 v1(162.294,172.859)
PIN50: U2.50 U3.22 | length 29.8
  Top Layer w0.254: v1(142.929,170.285) 143.31,169.904 145.139,169.904 145.7,170.465 U2.50 ; v1(143.383,163.576) 143.456,163.503 144.999,163.503 145.199,163.703 v1(146.558,163.703) ; v1(153.416,163.957) 153.743,164.284 155.528,164.284 158.007,166.763 U3.22
  Bottom Layer w0.254: v1@143.256,169.926 143.256,163.703 v1(143.383,163.576) ; v1(146.558,163.703) 146.812,163.957 v1(153.416,163.957)
PIN51: U2.51 U3.19 | length 19.3
  Top Layer w0.254: U2.51@146.471,172.974 v1(148.082,172.974) ; v1(155.448,167.767) 155.956,168.275 U3.19@158.932,168.275
  Bottom Layer w0.254: v1(148.082,172.974) 146.685,171.577 146.685,168.656 146.866,168.475 146.904,168.475 146.989,168.39 154.825,168.39 v1(155.448,167.767)
PIN52: U2.52 U3.20 | length 22.1
  Top Layer w0.254: v1(144.145,166.243) v1(146.685,166.243) ; v1@144.145,170.688 145.273,170.688 145.962,171.378 ; v1@156.489,167.132 157.12,167.763 U3.20
  Bottom Layer w0.254: v1(144.145,166.243) v1@144.145,170.688 ; v1(146.685,166.243) 146.8,166.128 153.974,166.128 154.289,166.443 155.8,166.443 v1@156.489,167.132
  other v1: 156.413,167.005 144.145,170.739
PIN89: P1.1 U2.89 | length 58.1
  Top Layer w0.254: v1(129.667,164.719) v1@129.667,164.673 ; v1(135.128,153.162) 135.128,153.212 130.135,158.205 130.135,161.111 128.905,162.341 128.905,163.106 129.667,163.868 v1@129.667,164.673 ; v1@129.667,164.673 130.327,164.013 U2.89@131.914,164.013 ; U2.89@131.914,164.013 U2.89 U2.89@131.914,164.013
  Bottom Layer w0.254: v1(135.128,153.162) 135.128,151.892 137.541,149.479 171.831,149.479 P1.1
RESET: C14.1 P1.5 P2.6 P3.1 R1.1 U2.90 | length 62.1
  Top Layer w0.254: v1(129.74,162.687) 129.667,162.687 129.667,162.941 130.191,163.465 U2.90 ; R1.1 137.4,147.371 P3.1 139.344,148.961 C14.1 ; v1(165.1,147.193) 165.1,147.828 P1.5
  Bottom Layer w0.254: v1(129.74,162.687) 129.74,158.283 134.293,153.73 134.293,151.368 138.29,147.371 P3.1 141.5,147.371 142.875,145.996 154.632,145.996 P2.6 158.049,147.259 165.034,147.259 v1(165.1,147.193)
RF-GND: C12.1 C26.1 CB1.1 CB2.1 CON1.3 CON1.4 CON1.5 CON1.6 CX3.1 CX4.1 L1.1 T1.5 T1.6 U3.1 U3.2 U3.3 U3.6 U3.27 U3.30 U3.31 U3.32 U3.33 | length 22.5
  Top Layer w0.254: CX4.1 v1(159.385,158.521) ; CB2.1 CB2.1@162.598,163.195 ; U3.33@162.42,166.637 U3.33@162.794,166.263 ; v1@165.369,162.067 CB1.1
  Top Layer w0.3: U3.27 160.794,166.763 v1(161.544,167.513) ; U3.1 U3.2 ; U3.6 162.294,168.263 v1(161.544,167.513) ; 164.151,164.913 U3.32 U3.31 ; CON1.5@169.279,167.132 CON1.5 169.291,167.037 v2(169.291,165.735) ; CON1.6 171.577,167.036 v2(171.577,165.735) ; v1(161.544,167.513) U3.33@162.294,166.763 ; U3.33@162.294,166.763 U3.3 U3.2 ; U3.33@162.294,166.763 U3.30 U3.31 ; U3.31 162.794,166.263 U3.2
  other v1: 163.322,158.369 165.354,158.369 165.227,160.147 163.322,161.798 165.354,162.052 160.655,166.624 162.408,166.624 160.655,168.402 162.408,168.402
  other v2: 173.228,165.735 173.228,167.132 170.434,168.529 168.148,171.45 169.503,171.45 170.857,171.45 172.212,171.45 171.45,173.355 171.45,175.133
  other v3: 166.624,164.465 167.64,164.465 166.624,165.354 167.64,165.354 168.148,166.497 166.751,172.339
  other v4: 168.021,169.926
  other v6: 168.148,167.513
RF-VCC: C26.2 CB2.2 L3.2 U3.28 | length 7.6
  Top Layer w0.254: CB2.2 161.097,162.372 v1(161.544,161.925) ; CB2.2@161.194,163.291 161.29,163.388 161.29,164.909 U3.28 ; L3.2 172.046,163.791 v1(172.466,164.211) ; L3.2@172.056,162.57 C26.2
TS: IC1.12 R26.2 R28.2 | length 6.5
  Top Layer w0.254: R26.2 R28.2 102.692,158.007 106.535,158.007 IC1.12
U-GND: L6.1 P4.ID P4.shield P4.UGND U4.1 | length 23.7
  Top Layer w0.254: P4.shield@121.567,147.87 v1@123.783,147.87 ; P4.shield@121.567,152.095 121.539,152.123 P4.shield@121.595,152.123 ; P4.shield@121.689,152.123 P4.shield@121.595,152.123 ; 123.018,152.123 P4.shield@121.595,152.123 ; v1@123.771,158.95 123.771,156.664 123.041,155.934 123.041,151.749 123.825,150.965 v1(123.825,150.876) ; v1(127.127,150.241) 127.292,150.406 P4.ID P4.ID@127.254,152.057 ; P4.UGND@128.092,151.816 P4.UGND ; P4.UGND@128.143,152.146 P4.UGND ; v1(128.27,150.241) 128.092,150.419 P4.UGND ; v1@129.328,147.87 P4.shield@131.417,147.87 ; v1(129.413,152.019) 129.461,152.067 131.445,152.067 P4.shield@131.417,152.095 ; v1@133.35,146.558 133.807,147.015 L6.1
  Bottom Layer w0.254: v1@123.825,159.004 123.825,158.974 U4.1
  other v1: 133.223,146.685 123.825,147.828 129.286,147.828 123.774,158.953
V-AC: C21.1 IC1.4 IC1.8 IC1.9 J1.2 J1.3 R25.2 | length 30.5
  Top Layer w0.254: IC1.8 111.066,157.421 v1(111.379,157.734) ; IC1.9 111.192,157.921 112.201,157.921 112.522,158.242 113.68,158.242 C21.1 116.498,159.004 R25.2 R25.2@116.447,160.122 ; IC1.4@110.294,155.444 IC1.4 111.352,155.421 v1(111.408,155.477)
  Bottom Layer w0.254: J1.3 109.144,171.044 J1.2 111.125,169.062 111.125,157.988 v1(111.379,157.734) ; v1(111.408,155.477) v1@111.408,157.705
VBUS: C19.1 IC1.20 P4.VBUS U1.8 U4.4 | length 45.9
  Top Layer w0.254: IC1.20 107.671,147.599 109.166,146.104 118.418,146.104 119.761,147.447 v1(119.761,152.146) ; U1.8 125.422,164.73 125.422,160.528 ; P4.VBUS v1(123.876,152.095) 123.876,153.467 v1(125.349,154.94) 125.422,155.013 125.422,160.528 ; C19.1 125.422,160.528
  Bottom Layer w0.254: v1(119.761,152.146) v1@123.825,152.146 ; U4.4 v1@125.349,155.05
VCC: C1.1 C2.1 C3.1 C4.1 C7.1 C8.1 C9.1 C10.1 C11.1 C13.1 C18.1 C23.1 C29.2 C30.2 CB4.1 F1.1 L3.1 L4.1 P1.2 P2.4 R1.2 R12.1 R13.2 R14.2 R15.2 R16.2 R17.2 R18.2 R19.2 R21.2 R22.2 U1.6 U1.7 U2.14 U2.24 U2.34 U2.44 U2.54 U2.64 U2.74 U2.83 U3.15 U5.5 U5.6 | length 121.2
  Top Layer w0.254: U5.5@110.214,161.839 108.798,161.839 v1(108.077,162.56) 108.626,163.109 U5.6@110.214,163.109 ; v1(110.236,166.878) 110.73,167.372 R21.2@112.141,167.372 ; R18.2 112.842,147.386 v1(113.665,148.209) 115.123,148.209 115.377,148.463 117.856,148.463 R16.2 116.459,149.865 116.459,153.797 116.713,154.051 119.253,154.051 v1(119.761,153.543) 120.838,154.62 R17.2 ; v1@120.838,162.24 R17.2 ; R17.2@120.904,155.448 R17.2 ; R22.2@122.008,175.641 R22.2@122.301,175.641 ; R22.2 124.318,175.26 ; U1.6 122.92,162.86 C18.1@123.42,162.36 ; U1.7 C18.1@123.42,162.36 ; v1(124.46,162.814) 123.982,162.336 C18.1 C18.1@123.42,162.36 ; C23.1 126.795,175.402 F1.1 126.365,174.752 v1(125.857,174.244) ; 127.002,162.384 127.616,162.998 v1(127.616,163.017) ; v1(129.667,167.259) 129.961,166.965 U2.83 ; U2.74 134.962,171.378 135.652,170.688 v1(136.779,170.688) ; v1(135.636,148.463) 135.851,148.678 R1.2 ; v1@139.497,170.739 139.962,171.204 U2.64 ; 140.962,154.378 141.202,154.138 141.874,154.138 v5(142.265,153.746) ; v1(144.526,175.26) 144.526,175.18 144.914,174.792 U2.54@144.914,173.013 ; U2.24 145.962,154.266 v1(146.558,153.67) ; v1(146.836,162.465) U2.34 ; U2.44 151.594,167.465 R15.2 v1(153.604,167.066) ; C30.2 153.858,157.673 156.613,157.673 L4.1 159.512,155.956 v1(159.893,156.337) ; v1@153.858,158.938 v1(153.924,159.004) R14.2 ; v1(154.305,173.99) 154.874,173.421 R13.2 ; P2.4 159.512,146.619 C8.1 ; v1(159.766,173.99) 159.654,173.878 CB4.1 159.654,171.435 160.294,170.795 U3.15 ; C29.2@167.65,162.56 L3.1 170.346,164.299 v1(170.18,164.465) ; C7.1 173.228,147.889 P1.2
  Bottom Layer w0.254: v1(120.904,162.306) 123.952,162.306 v1(124.46,162.814) v1@124.652,162.622 ; v1(129.667,167.259) 130.429,166.497 C11.1 ; C3.1@134.747,172.466 C3.1 134.874,172.187 136.373,170.688 v1(136.779,170.688) ; v1@139.548,170.688 139.319,170.917 139.319,171.816 C10.1 ; C4.1 142.265,155.042 v5(142.265,153.746) ; v1(144.526,175.26) 144.907,174.879 144.907,173.512 C2.1 ; C9.1 146.346,155.914 146.346,153.966 146.558,153.754 v1(146.558,153.67) ; v1(146.836,162.465) C1.1@148.558,162.465 ; C13.1 148.755,167.259 149.432,166.582 153.12,166.582 v1(153.604,167.066)
  other v1: 139.548,170.73
pads on no net: A1.2 J1.NC P1.3 P1.4 P2.7 P2.8 U1.10 U1.13 U1.14 U1.15 U1.16 U1.17 U1.18 U1.19 U1.20 U1.21 U1.22 U2.1 U2.2 U2.5 U2.6 U2.7 U2.8 U2.25 U2.26 U2.27 U2.28 U2.29 U2.30 U2.31 U2.32 U2.35 U2.36 U2.37 U2.38 U2.39 U2.40 U2.41 U2.42 U2.45 U2.55 U2.56 U2.57 U2.58 U2.59 U2.60 U2.61 U2.62 U2.65 U2.66 U2.67 U2.68 U2.69 U2.70 U2.71 U2.72 U2.75 U2.76 U2.77 U2.78 U2.79 U2.80 U2.81 U2.82 U2.85 U2.86 U2.87 U2.88 U2.95 U2.96 U2.97 U2.98 U2.99 U2.100 U5.7 Xtal1.2 Xtal1.4 Xtal2.2 Xtal2.4

## Polygon pours and split planes (outlines as drawn)
RF-GND on Top Layer "RFGND" (solid, remove dead copper, pour order 1000): 155.575,157.353 155.575,162.814 157.607,164.846 164.084,164.846 164.084,169.037 164.211,169.164 165.735,169.164 166.116,169.545 166.116,176.022 173.355,176.022 173.355,170.053 175.387,170.053 175.514,170.053 175.387,169.926 175.387,157.353
GND on Internal Plane 1 (split plane): 165.932,169.472 165.627,169.166 164.138,169.166 163.832,169.472 163.832,169.926 163.823,169.976 163.795,170.018 162.652,171.161 162.61,171.189 162.56,171.198 159.385,171.198 159.335,171.189 159.293,171.161 159.166,171.034 159.138,170.992 159.129,170.942 159.129,169.547 157.861,169.547 157.811,169.538 157.769,169.51 157.741,169.468 157.732,169.418 157.732,167.007 155.575,167.007 155.525,166.998 155.483,166.97 155.455,166.928 155.446,166.878 155.446,164.497 155.446,159.734 155.446,157.353 155.455,157.303 155.483,157.261 155.525,157.233 155.575,157.224 166.497,157.224 166.547,157.233 166.589,157.261 166.617,157.303 166.626,157.353 166.626,163.447 175.385,163.447 175.385,146.052 134.241,146.052 134.241,147.701 134.232,147.751 134.204,147.793 134.162,147.821 134.112,147.83 133.098,147.83 133.098,154.178 133.089,154.228 133.061,154.27 133.019,154.298 132.969,154.307 120.142,154.307 120.092,154.298 120.05,154.27 120.022,154.228 120.013,154.178 120.013,146.052 99.697,146.052 99.697,176.02 110.361,176.02 110.361,174.371 110.37,174.321 110.398,174.279 110.44,174.251 110.49,174.242 114.935,174.242 114.985,174.251 115.027,174.279 115.055,174.321 115.064,174.371 115.064,176.02 141.984,176.02 141.984,169.928 131.572,169.928 131.522,169.919 131.48,169.891 131.452,169.849 131.443,169.799 131.443,157.48 131.452,157.43 131.48,157.388 131.522,157.36 131.572,157.351 147.447,157.351 147.497,157.36 147.539,157.388 147.567,157.43 147.576,157.48 147.576,161.671 147.567,161.721 147.539,161.763 147.497,161.791 147.447,161.8 145.29,161.8 145.29,176.02 165.932,176.02
RF-GND on Internal Plane 1 (split plane): 172.974,170.053 175.385,170.053 175.385,163.705 166.497,163.705 166.447,163.696 166.405,163.668 166.377,163.626 166.368,163.576 166.368,157.482 155.704,157.482 155.704,159.734 155.704,164.497 155.704,166.749 157.861,166.749 157.911,166.758 157.953,166.786 157.981,166.828 157.99,166.878 157.99,169.289 159.258,169.289 159.308,169.298 159.35,169.326 159.378,169.368 159.387,169.418 159.387,170.888 159.439,170.94 162.506,170.94 163.574,169.872 163.574,169.418 163.583,169.368 163.611,169.326 163.992,168.945 164.034,168.917 164.084,168.908 165.68,168.908 165.73,168.917 165.772,168.945 166.153,169.326 166.181,169.368 166.191,169.418 166.191,176.02 172.974,176.02
A-GND on Internal Plane 1 (split plane): 145.032,161.671 145.041,161.621 145.069,161.579 145.111,161.551 145.161,161.542 147.318,161.542 147.318,157.609 131.701,157.609 131.701,169.67 142.113,169.67 142.163,169.679 142.205,169.707 142.233,169.749 142.242,169.799 142.242,176.02 145.032,176.02
U-GND on Internal Plane 1 (split plane): 132.84,148.717 132.84,147.701 132.849,147.651 132.877,147.609 132.919,147.581 132.969,147.572 133.983,147.572 133.983,146.052 120.271,146.052 120.271,154.049 132.84,154.049
DC-GND on Internal Plane 1 (split plane): 114.806,174.5 110.619,174.5 110.619,176.02 114.806,176.02
VCC on Internal Plane 2 (split plane): 172.974,170.053 175.385,170.053 175.385,165.229 171.323,165.229 171.273,165.22 171.231,165.192 171.203,165.15 171.194,165.1 171.194,163.832 160.274,163.832 160.224,163.823 160.182,163.795 160.154,163.753 160.145,163.703 160.145,160.909 160.154,160.859 160.182,160.817 160.224,160.789 160.274,160.78 175.385,160.78 175.385,146.052 99.697,146.052 99.697,176.02 140.587,176.02 140.587,167.896 133.477,167.896 133.427,167.887 133.385,167.859 133.357,167.817 133.348,167.767 133.348,157.48 133.357,157.43 133.385,157.388 133.427,157.36 133.477,157.351 147.447,157.351 147.497,157.36 147.539,157.388 147.567,157.43 147.576,157.48 147.576,161.671 147.567,161.721 147.539,161.763 147.497,161.791 147.447,161.8 143.639,161.8 143.639,176.02 172.974,176.02
A-VCC on Internal Plane 2 (split plane): 143.381,161.671 143.39,161.621 143.418,161.579 143.46,161.551 143.51,161.542 147.064,161.542 147.064,157.609 133.606,157.609 133.606,167.638 140.716,167.638 140.766,167.647 140.808,167.675 140.836,167.717 140.845,167.767 140.845,176.02 143.381,176.02
RF-VCC on Internal Plane 2 (split plane): 175.385,161.038 160.403,161.038 160.403,163.574 171.323,163.574 171.373,163.583 171.415,163.611 171.443,163.653 171.452,163.703 171.452,164.971 175.385,164.971

## Other copper
Internal Plane 1 (plane layer: these items are gaps in the copper):
  rectangle: 172.974,170.053 176.276,176.53
  lines w0.254: 110.49,176.53 110.49,174.371 114.935,174.371 114.935,176.53 ; 120.142,145.288 120.142,154.178 123.825,154.178 127,154.178 130.302,154.178 132.969,154.178 ; 132.969,148.717 132.969,154.178 ; 134.112,145.288 134.112,147.701 132.969,147.701 132.969,154.178 ; 142.113,176.911 142.113,169.799 139.478,169.799 138.303,169.799 131.572,169.799 131.572,157.48 147.447,157.48 147.447,161.671 145.161,161.671 145.161,176.53 ; 166.061,176.53 166.061,169.418 165.68,169.037 164.084,169.037 163.703,169.418 163.703,169.926 162.56,171.069 159.385,171.069 159.258,170.942 159.258,169.418 157.861,169.418 157.861,166.878 155.575,166.878 155.575,164.497 155.575,159.734 155.575,157.353 166.497,157.353 166.497,163.576 176.149,163.576
Internal Plane 2 (plane layer: these items are gaps in the copper):
  rectangle: 172.974,170.053 176.276,176.53
  lines w0.254: 140.081,176.53 140.716,176.53 ; 140.716,176.911 140.716,167.767 133.477,167.767 133.477,157.48 143.129,157.48 147.447,157.48 ; 143.51,157.48 147.447,157.48 ; 143.51,176.657 143.51,161.671 147.447,161.671 ; 146.685,161.671 147.447,161.671 ; 147.193,157.48 147.193,161.671 ; 175.895,165.1 171.323,165.1 171.323,163.703 160.274,163.703 160.274,160.909 176.022,160.909 ; 147.447,157.48 147.447,161.671 ; 147.447,157.48 147.447,161.671

## Silkscreen, mask and mechanical layers (free items; w line width, h text height)
Top Overlay:
  text "epf" at 104.013,170.942 h1.3
  text "Marina" at 161.29,155.575 h1.5
  text "ULPGC" at 170.053,154.305 h1
  text "Martin" at 161.29,153.289 h1.5
Mechanical 1:
  lines w0.254: 99.187,145.669 99.314,145.542 175.895,145.542 175.895,176.403 175.768,176.53 99.187,176.53 99.187,145.669

## Text inside footprints (layer, text, board x,y; h text height)
CON1: Top Overlay "OUT" at 170.907,168.378 h0.2; Top Overlay "IN" at 169.432,168.372 h0.2
P1: Top Overlay "6" at 166.624,148.844 h1.27 r180; Top Overlay "5" at 166.624,151.384 h1.27 r180; Top Overlay "2" at 175.768,148.844 h1.27 r180; Top Overlay "1" at 175.26,151.384 h1.27 r180
P2: Top Overlay "2" at 164.592,148.844 h1.27 r180; Top Overlay "1" at 164.084,151.384 h1.27 r180; Top Overlay "9" at 150.368,151.384 h1.27 r180